# Altium PCB amplifier.PcbDoc
Units mm, origin at the board's own origin, x right, y up, seen from the top; angles counter-clockwise.
Board outline 98.04 x 69.72 mm, 2 copper layers (Top Layer, Bottom Layer); 32 components, 22 nets, 73 pads, 5 vias.
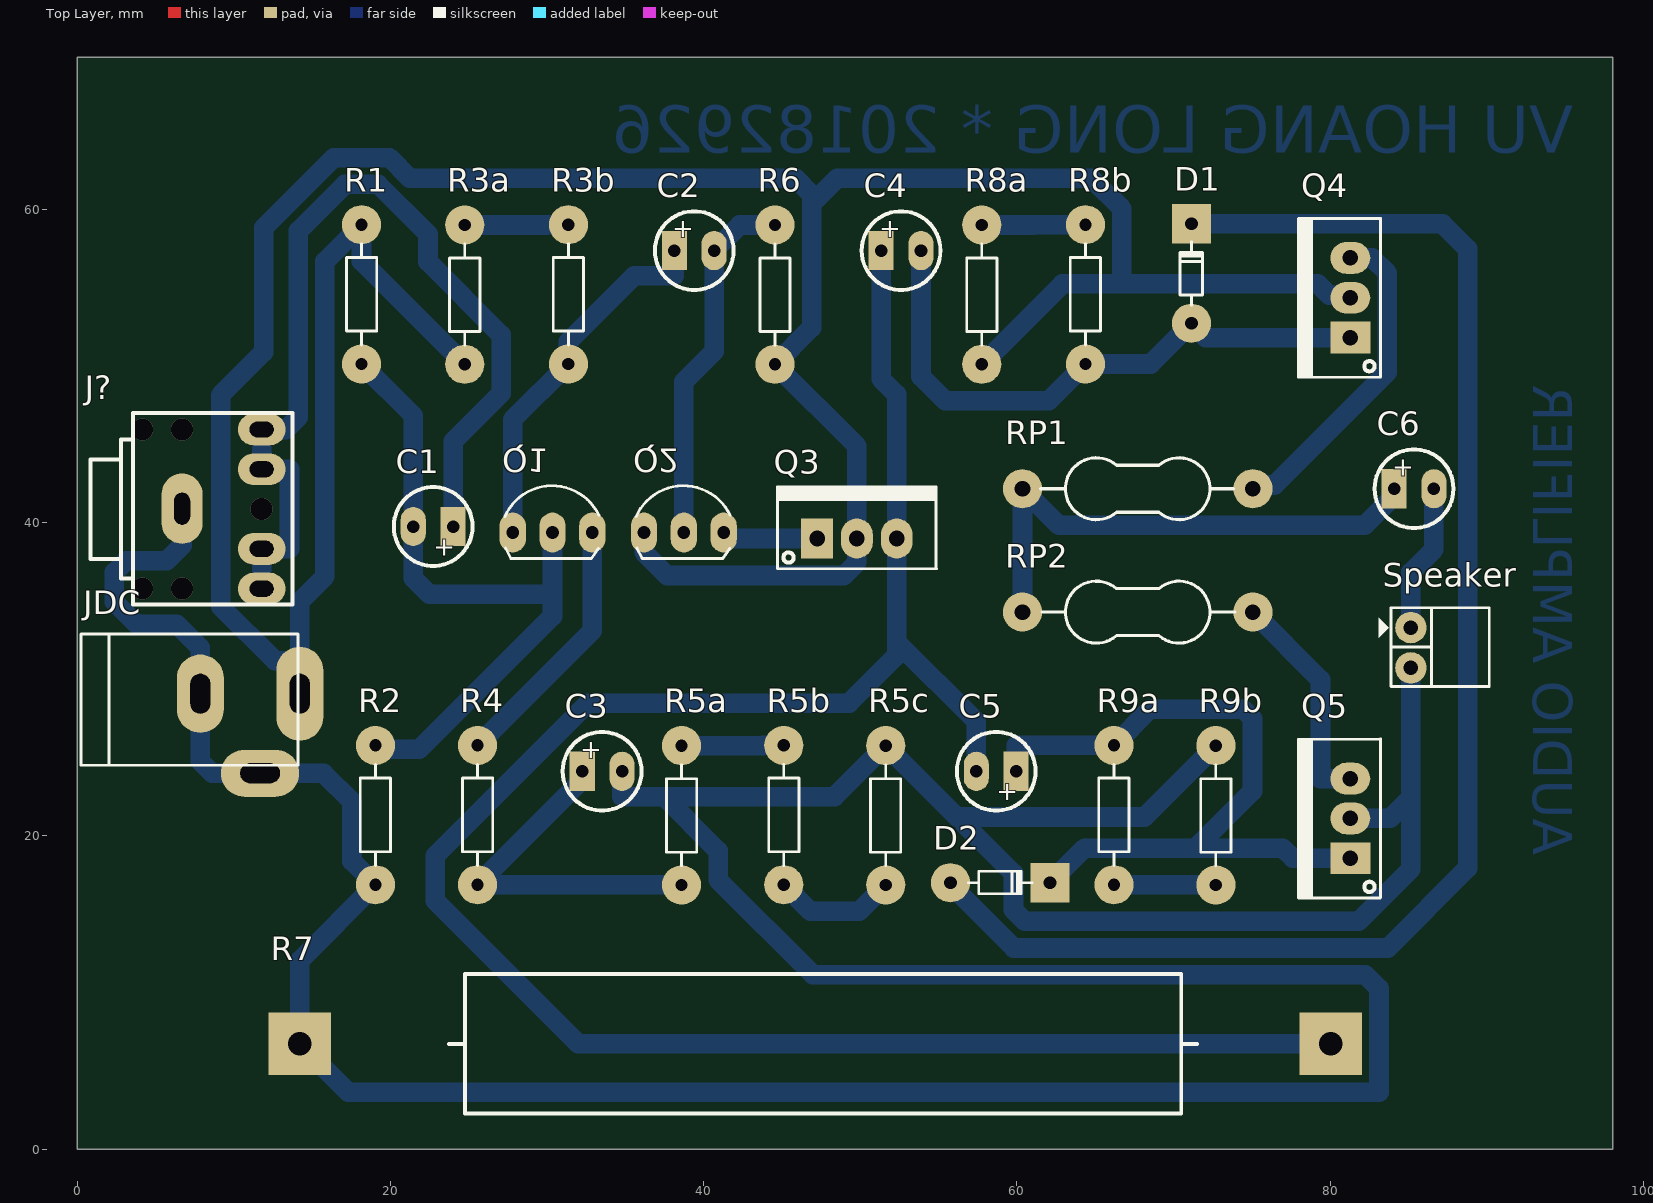
[diagram p0: Top Layer view]
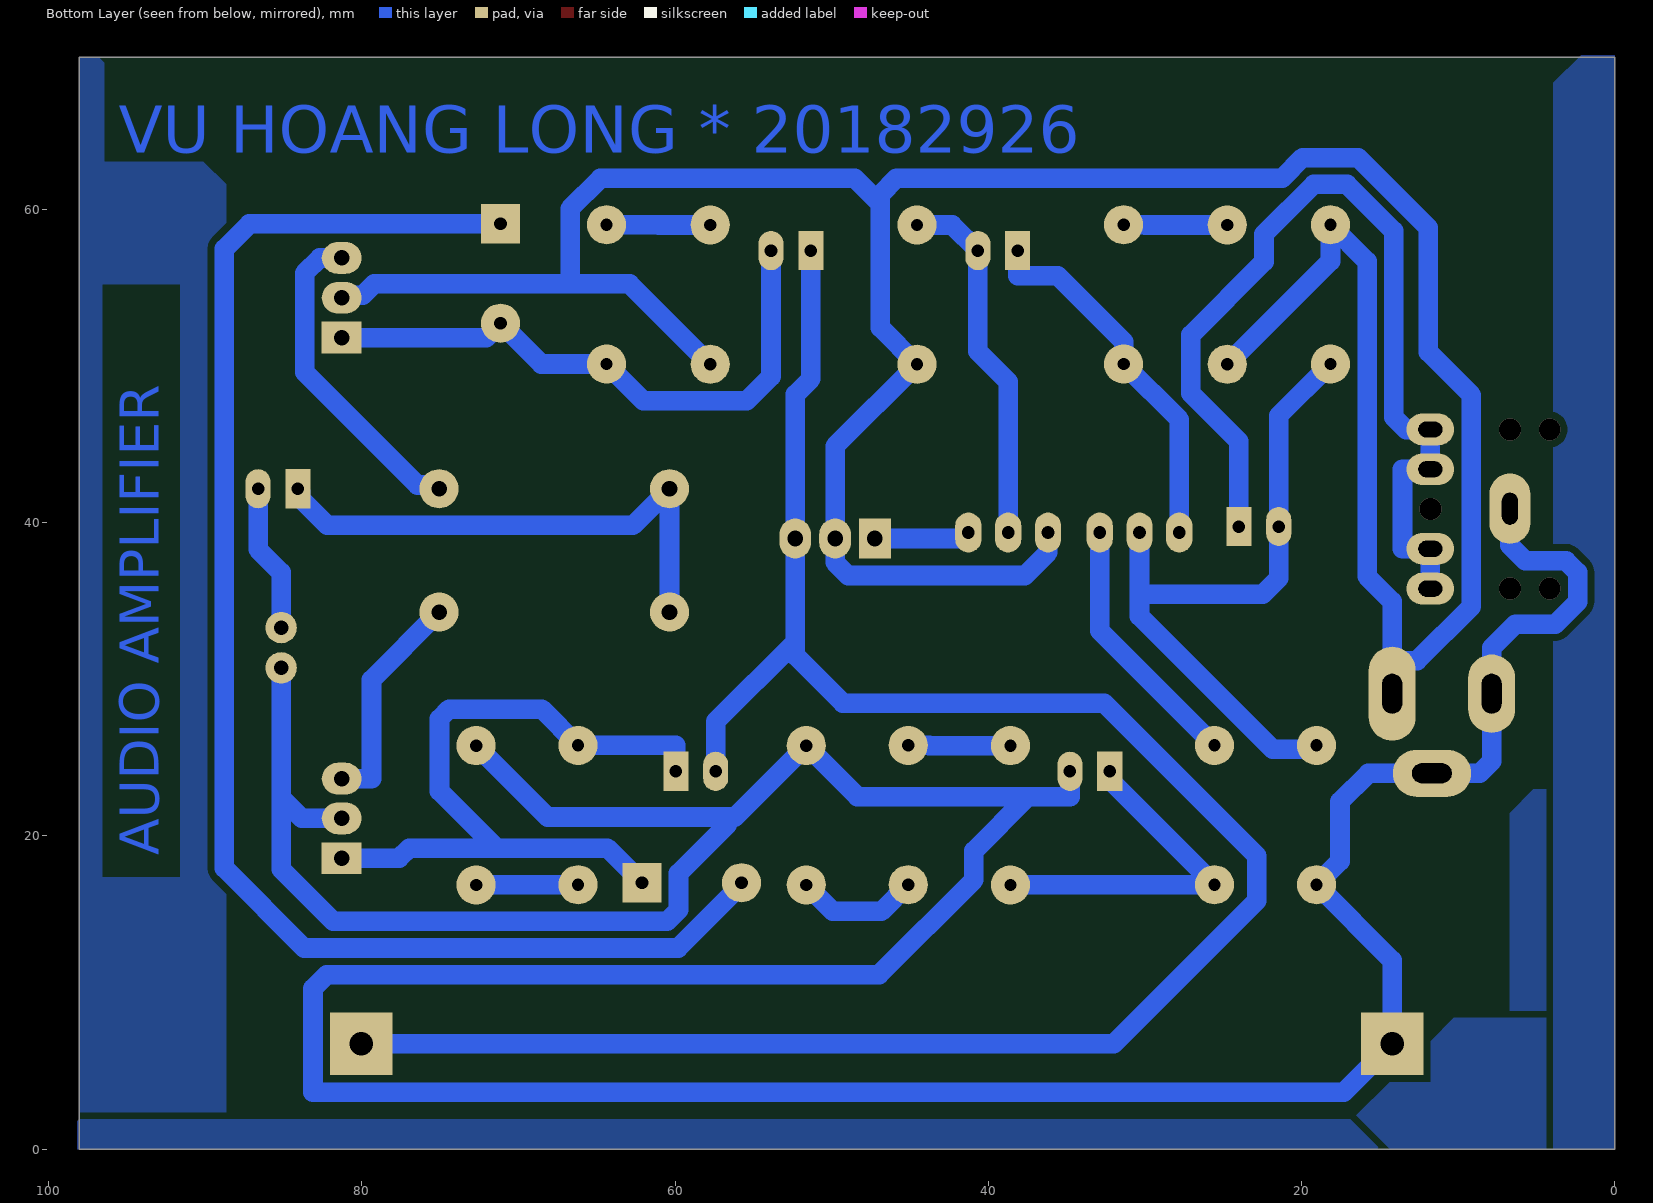
[diagram p1: Bottom Layer view, seen from below]
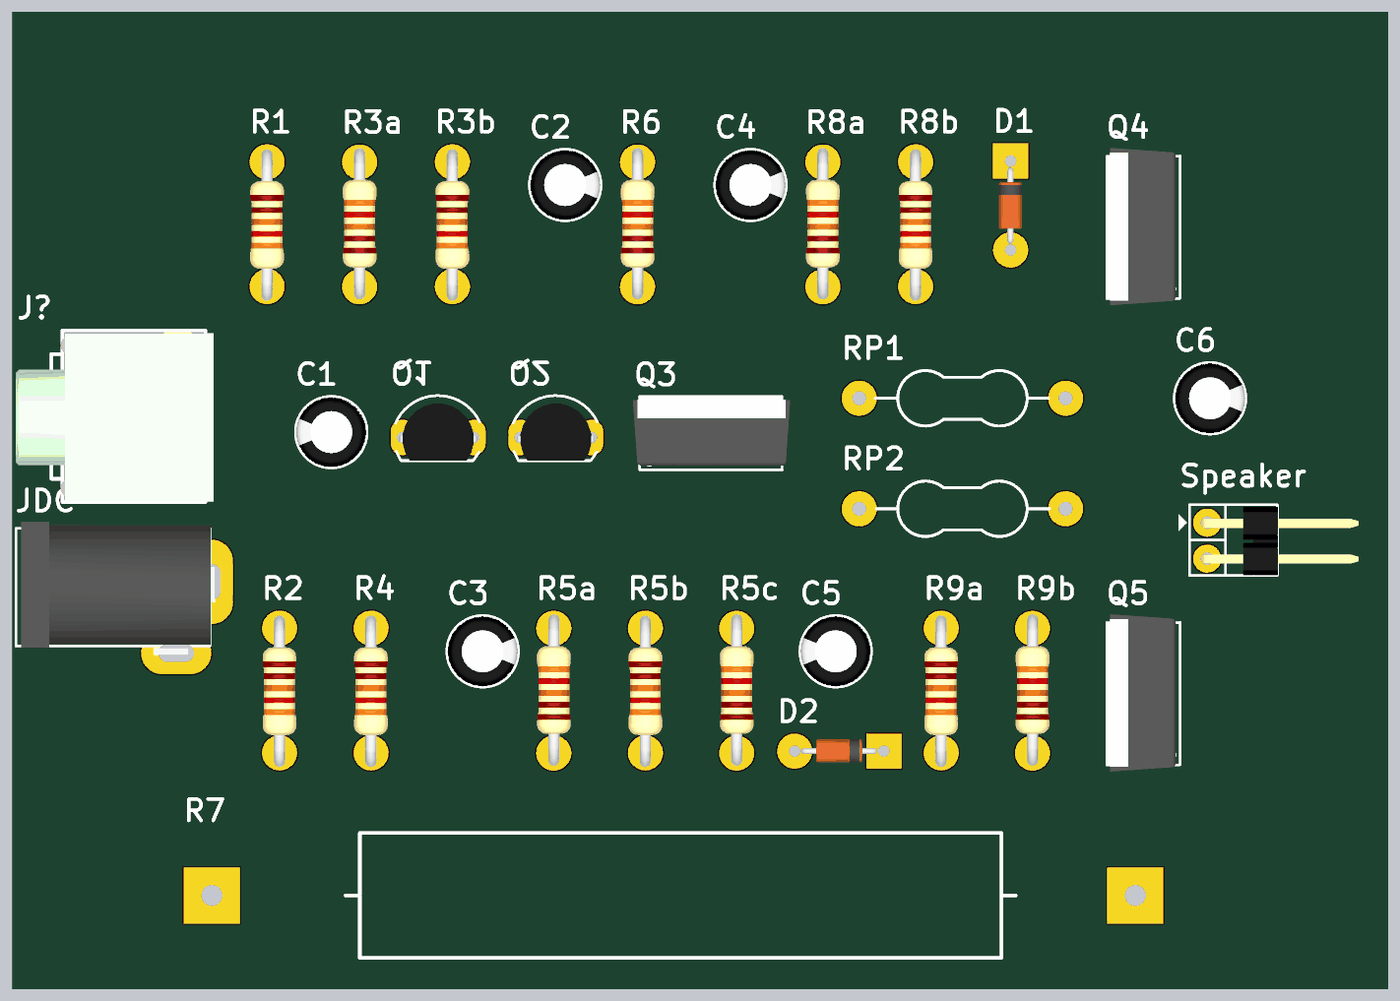
[diagram p2: 3D render of the assembled board from above, using the file's embedded part models]

## Layer stack, top to bottom
Top Solder: solder mask 0.0102, Solder Resist, Dk 3.5
Top Layer: signal copper 0.0356
Dielectric 1: dielectric 0.32, FR-4, Dk 4.8
Bottom Layer: signal copper 0.0356
Bottom Solder: solder mask 0.0102, Solder Resist, Dk 3.5

## Board outline
0,0 98.044,0 98.044,69.723 0,69.723

## Design rules (kind name [scope] priority, off if disabled: settings)
Clearance [All] p1: gap=0.45 ignorepadtopadclearanceinfootprint=FALSE
PolygonConnect [All] p1: connectstyle=Relief reliefconductorwidth=0.254 reliefentries=4 polygonreliefangle="90 Angle" airgapwidth=0.254
RoomDefinition amplifier [InComponentClass('amplifier')] p1: confinementstyle=ConfineIn formatcopy=TRUE lockcomponents=FALSE outline -2.565,-1.524 101.092,-1.524 101.092,71.755 -2.565,71.755
RoutingLayers [All] p1: top layer_v5=FALSE bottom layer_v5=TRUE
RoutingVias [All] p1: holewidth=0.711 width=1.5 viastyle="Through Hole" minholewidth=0.711 minwidth=1.5 maxholewidth=0.711 maxwidth=1.5
SolderMaskExpansion [All] p1: expansion=0.102 istentingtop=FALSE
Width [All] p1: maxlimit=1.25 minlimit=1.25 preferedwidth=1.25
29 further rules are at their usual default settings.

## Components (designator, comment, footprint, x,y, rotation, side; value= is the part's Value field where it differs from the comment)
C1 "220uF" C5mm 22.733,39.751 r180 top
C2 "220uF" C5mm 39.4,57.365 r0 top
C3 "220uF" C5mm 33.518,24.13 r0 top
C4 "220uF" C5mm 52.602,57.365 r0 top
C5 "220uF" C5mm 58.674,24.13 r180 top
C6 "2200uF" C5mm 85.344,42.164 r0 top
D1 "1N4148" D0.5A 71.136,55.904 r270 top
D2 "1N4148" D0.5A 58.928,17.018 r180 top
J? "Audio In" "CON Phone2" 9.246,40.869 r90 top
JDC "Jac DC" DC0 11.049,26.543 r0 top
Q1 "BC547B" QTO-92 30.353,39.37 r180 top value=C9014
Q2 "BC547B" QTO-92 38.735,39.37 r180 top value=C9014
Q3 "TIP41C" QTO-220 47.244,38.989 r0 top
Q4 "TIP41C" QTO-220 81.28,51.816 r90 top
Q5 "TIP42C" QTO-220 81.28,18.581 r90 top
R1 "13k" R1/4W 18.161,50.126 r90 top value="R1/4W - 1K"
R2 "2.7k" R1/4W 19.05,16.891 r90 top value="R1/4W - 1K"
R3a "200" R1/4W 24.75,59.001 r270 top value="R1/4W - 1K"
R3b "200" R1/4W 31.363,50.126 r90 top value="R1/4W - 1K"
R4 "6.2" R1/4W 25.566,16.891 r90 top value="R1/4W - 1K"
R5a "43" R1/4W 38.587,25.766 r270 top value="R1/4W - 1K"
R5b "43" R1/4W 45.116,16.891 r90 top value="R1/4W - 1K"
R5c "6.2" R1/4W 51.62,25.766 r270 top value="R1/4W - 1K"
R6 "120k" R1/4W 44.553,59.001 r270 top value="R1/4W - 1K"
R7 "10" "DIEN TRO 10W" 22.225,6.731 r0 top
R8a "200" R1/4W 57.755,59.001 r270 top value="R1/4W - 1K"
R8b "68" R1/4W 64.369,50.126 r90 top value="R1/4W - 1K"
R9a "68" R1/4W 66.189,16.891 r90 top value="R1/4W - 1K"
R9b "200" R1/4W 72.693,25.766 r270 top value="R1/4W - 1K"
RP1 "0.47" "DIEN TRO 1W (tube)" 60.35,42.164 r0 top
RP2 "0.47" "DIEN TRO 1W (tube)" 75.057,34.29 r180 top
Speaker "Jumper 2" jp2h 85.141,33.299 r270 top value="JP 2"

## Footprints (in the part's own frame and the unit in brackets; to place one, negate y for a bottom-side part, rotate by r counter-clockwise, add the part's x,y. Pads: shape width x height; smd on the part's side, far side on the other; paste and mask are expansions set on the pad)
C5mm [mm]
  rect 1.6x2.5 hole 0.8: 1(-1.27,0)
  oval 1.6x2.5 hole 0.8: 2(1.27,0)
  silkscreen extent -2.51,-2.51 2.51,2.51, body extent -2.5,-2.5 2.49,2.5, height 11.01
"CON Phone2" [mil]
  oval 80x120 hole 40 slot 60 at 90 deg: 1(-200,-100) 2(-100,-100) 3(100,-100) 4(200,-100)
  oval 177.17x102.36 hole 40 slot 80 at 0 deg: 5(1,100)
  silkscreen extent -240,-178 241,330, body extent -239,-202 233,354, height 394
D0.5A [mm] "Diode muoi, W 80mil, L 300mil"
  round 2.5 hole 0.813: 1(3.175,0)
  rect 2.5x2.5 hole 0.813: 2(-3.175,0)
  silkscreen extent -2.03,-0.76 2.03,0.71, body extent -2.76,-0.84 2.76,0.81, height 1.56
DC0 [mm] "Jac DC input"
  oval 3x6 hole 1.27 slot 2.54 at 90 deg: 1(3.175,2.54)
  oval 3x5 hole 1.27 slot 2.54 at 90 deg: 2(-3.175,2.54)
  oval 5x3 hole 1.27 slot 2.54 at 0 deg: 3(0.635,-2.54)
  silkscreen extent -10.79,-2.03 3.05,6.35, body extent -10.42,-2.67 3.4,6.84, height 11.02
"DIEN TRO 1W (tube)" [mm] "Dien tro 1W hinh ong"
  round 2.5 hole 1: 1(0,0) 2(14.707,0)
  silkscreen extent 1.14,-1.98 13.46,1.98
"DIEN TRO 10W" [mm]
  rect 4x4 hole 1.5: 1(-8,0) 2(57.8,0)
  silkscreen extent 1.52,-4.44 49.28,4.44, body extent 2.54,-4.44 48.26,4.44, height 7.62
jp2h [mm]
  round 2 hole 0.914: 1(0,0) 2(2.565,0)
  silkscreen extent -1.27,-2.06 3.76,5, body extent -1.12,-0.36 3.76,10.78, height 2.52
QTO-92 [mil] "TO-92"
  oval 66x100 hole 32: 1(-100,0) 2(0,0) 3(100,0)
  silkscreen extent -117,-118 120,65, body extent -109,-96 109,66, height 245
QTO-220 [mil] "TO-220 - 1-2-3"
  rect 80x100 hole 39: 1(0,0)
  oval 80x100 hole 39: 2(100,0) 3(200,0)
  silkscreen extent -100,-76 300,130, body extent -119,-64 322,121, height 755
R1/4W [mm] "R 1/4W, 2 Pin, 350mil"
  round 2.5 hole 0.787: 1(0,0) 2(8.89,0)
  silkscreen extent 1.22,-0.97 7.67,0.97, body extent -1.01,-1.19 9.79,1.21, height 2.83

## Part data
C1 C2 C3 C4 C5 C6: library part "Cap Pol 5mm", "Polarized Capacitor (Axial)", LatestRevisionDate=17-Jul-2002, LatestRevisionNote="Re-released for DXP Platform.", PackageReference=POLAR0.8, Published=8-Jun-2000, Publisher="Altium Limited"
D1 D2: library part D0.5A, "D0.5A"
J?: library part "CON Phone2", "Jac Phone Stereo", Creat by=VanDungEvn@Gmail.com
JDC: library part DCIN, "Jac DC input"
Q1 Q2: library part NPN_EBC, "P 600mW, EBC"
Q3 Q4: "NPN 2W, BCE"
Q5: "PNP 2W, BCE"
R1 R2 R3a R3b R4 R5a R5b R5c R6 R8a R8b R9a R9b: library part R1/4W, "Resistor 1/4W"
R7: library part "Res 10 W", "10W Res Power", Creator="Nguyen Ba Bien"
RP1 RP2: library part "Res 1W", "1W Res Power", Creator="Nguyen Ba Bien"
Speaker: library part "JP 2"

## Via types
v1: diameter 1.397, hole 1.397, Top Layer to Bottom Layer, 5 vias

## Nets (pads, with @x,y where several pads share a name; then routed paths per layer and width w, separated by ;. In a path a pad name is that pad's centre, name@x,y a point inside that pad or via, vN(x,y) a via of type N, cw(c..) or ccw(c..) an arc to the next point about the centre after c; other vN are vias at no path point)
+12: JDC.1 Q2.3 Q3.2 Q4.2 R1.2 R3a.2 R6.2 R8a.2 | length 207.9
  Bottom Layer w1.25: JDC.1 JDC.1@14.224,31.191 ; R3a.2 18.161,56.7 R1.2 15.824,56.679 15.824,36.576 14.224,34.976 JDC.1@14.224,31.191 ; Q2.3 36.195,38.1 37.668,36.627 48.946,36.627 49.784,37.465 Q3.2 49.784,44.88 R6.2 46.888,52.446 46.888,60.35 ; R8a.2 62.89,55.245 66.548,55.245 ; Q4.2@80.814,54.356 Q4.2 81.13,54.506 79.941,54.506 79.202,55.245 66.548,55.245 ; JDC.1@14.224,31.191 12.624,31.191 9.169,34.646 9.169,48.133 11.917,50.881 11.917,58.822 16.39,63.295 19.932,63.295 21.238,61.989 45.86,61.989 46.888,60.96 46.888,60.35 ; 46.888,60.35 48.514,61.976 64.77,61.976 66.7,60.046 66.7,55.397 66.548,55.245
GND: C3.2 J?.5 JDC.2 JDC.3 Q5.2 R2.1 R5c.1 R7.1 R9b.1 Speaker.2 | length 277
  Bottom Layer w1.25: J?.5 6.706,38.557 5.715,37.567 3.124,37.567 2.388,36.83 2.388,34.95 3.81,33.528 6.35,33.528 7.874,32.004 JDC.2 7.874,24.765 8.636,24.003 JDC.3 15.748,24.003 17.551,22.2 17.551,18.39 R2.1 14.225,12.066 R7.1 17.324,3.632 83.109,3.632 83.109,10.262 82.22,11.151 46.964,11.151 40.919,17.196 40.919,19.05 37.465,22.504 ; C3.2 34.788,22.504 37.465,22.504 ; R9b.1 68.137,21.209 57.15,21.209 ; Q5.2 83.82,21.121 85.141,22.442 ; Speaker.2 85.141,22.442 ; 37.465,22.504 48.359,22.504 R5c.1 56.177,21.209 57.15,21.209 ; 57.15,21.209 56.663,20.722 59.778,17.608 59.778,15.283 60.51,14.551 81.81,14.551 85.141,17.882 85.141,22.442
NetC1_1: C1.1 J?.1 J?.2 J?.3 J?.4 | length 61
  Bottom Layer w1.25: J?.1 J?.2 13.564,38.329 13.564,43.409 J?.3 J?.4 13.335,45.949 14.122,46.736 14.122,58.623 17.094,61.595 19.228,61.595 22.403,58.42 22.403,56.667 27.076,51.994 27.076,48.26 24.003,45.187 C1.1@24.003,39.738
NetC1_2: C1.2 Q1.2 R1.1 R2.2 | length 44.7
  Bottom Layer w1.25: R1.1 21.463,46.824 C1.2 21.463,36.449 22.479,35.433 30.226,35.433 30.353,35.56 ; R2.2 19.289,25.542 21.829,25.542 21.844,25.527 30.353,34.036 30.353,35.56 ; Q1.2 30.353,35.56
NetC2_1: C2.1 Q1.3 R3b.1 | length 23.8
  Bottom Layer w1.25: Q1.3 27.813,46.576 R3b.1 31.363,51.556 35.56,55.753 38.13,55.753 C2.1
NetC2_2: C2.2 Q2.2 R6.1 | length 23.4
  Bottom Layer w1.25: Q2.2 38.735,48.997 40.67,50.931 C2.2 42.306,59.001 R6.1
NetC3_1: C3.1 R4.1 R5a.2 | length 23
  Bottom Layer w1.25: C3.1 32.248,23.573 R4.1 32.055,16.891 32.07,16.876 R5a.2
NetC4_1: C4.1 C5.2 Q3.3 R7.2 | length 135.2
  Bottom Layer w1.25: C4.1 51.332,49.176 52.324,48.184 Q3.3 52.324,32.385 ; C5.2 57.404,27.305 52.324,32.385 ; R7.2 32.004,6.731 22.86,15.875 22.86,18.72 32.614,28.473 49.291,28.473 52.324,31.506 52.324,32.385
NetC4_2: C4.2 D1.1 Q4.1 R8b.1 | length 38.5
  Bottom Layer w1.25: C4.2 53.872,49.328 55.423,47.777 62.02,47.777 R8b.1 68.532,50.126 D1.1 72.049,51.816 Q4.1
NetC5_1: C5.1 D2.2 Q5.1 R9a.2 | length 48.1
  Bottom Layer w1.25: C5.1 59.944,25.781 R9a.2 68.501,28.092 74.422,28.092 75.032,27.483 75.032,22.86 71.399,19.228 ; D2.2 64.313,19.228 71.399,19.228 ; Q5.1 77.609,18.581 76.962,19.228 71.399,19.228
NetC6_1: C6.1 RP1.1 RP2.2 | length 33.8
  Bottom Layer w1.25: RP2.2 RP1.1 62.687,39.827 82.187,39.827 83.899,41.539 83.899,41.989 C6.1
NetC6_2: C6.2 Speaker.1 | length 9.5
  Bottom Layer w1.25: Speaker.1 85.141,36.824 86.614,38.297 C6.2
NetD1_2: D1.2 D2.1 | length 94.8
  Bottom Layer w1.25: D2.1 55.753,16.904 59.806,12.851 83.679,12.851 88.773,17.944 88.773,57.479 87.173,59.079 D1.2
NetQ1_1: Q1.1 R4.2 | length 16.6
  Bottom Layer w1.25: R4.2 32.893,33.108 Q1.1
NetQ2_1: Q2.1 Q3.1 | length 6.1
  Bottom Layer w1.25: Q2.1 41.656,38.989 Q3.1
NetQ4_3: Q4.3 RP1.2 | length 20.8
  Bottom Layer w1.25: RP1.2 75.296,42.403 76.439,42.403 83.642,49.606 83.642,55.931 82.677,56.896 Q4.3
NetQ5_3: Q5.3 RP2.1 | length 14.3
  Bottom Layer w1.25: RP2.1 79.375,29.972 79.375,23.661 Q5.3
NetR3a_1: R3a.1 R3b.2 | length 6.6
  Bottom Layer w1.25: R3a.1 29.992,59.001 30.008,59.016 R3b.2
NetR5a_1: R5a.1 R5b.2 | length 6.5
  Bottom Layer w1.25: R5a.1 43.759,25.766 43.774,25.781 R5b.2
NetR5b_1: R5b.1 R5c.2 | length 7.9
  Bottom Layer w1.25: R5b.1 46.823,15.183 49.928,15.183 R5c.2
NetR8a_1: R8a.1 R8b.2 | length 6.6
  Bottom Layer w1.25: R8a.1 61.036,59.001 61.051,59.016 R8b.2
NetR9a_1: R9a.1 R9b.2 | length 6.5
  Bottom Layer w1.25: R9a.1 72.678,16.891 R9b.2
copper on no net:
  other v1: 4.166,35.789 6.706,35.789 11.786,40.869 4.166,45.949 6.706,45.949

## Polygon pours and split planes (outlines as drawn)
no net on Bottom Layer "NONET_L02_P011" (solid, pour order 11): 3.937,22.987 5.207,22.987 6.731,21.463 6.731,8.255 4.064,8.255 3.937,8.382
no net on Bottom Layer "NONET_L02_P010" (solid, pour order 10): 14.351,0 16.51,2.159 10.287,8.382 3.937,8.382 3.937,0.381 3.556,0
no net on Bottom Layer "NONET_L02_P009" (solid, pour order 9): 3.937,68.072 2.159,69.85 0,69.85 0,0 3.937,0
no net on Bottom Layer "NONET_L02_P002" (solid, pour order 2): 98.044,1.905 98.044,69.723 96.774,69.723 88.646,61.595 88.646,1.905
no net on Bottom Layer "NONET_L02_P001" (solid, pour order 1): 16.129,1.905 98.044,1.905 98.171,1.778 98.171,0 14.351,0

## Other copper
Bottom Layer:
  text "VU HOANG LONG * 20182926" at 95.504,63.627 h3
  text "AUDIO AMPLIFIER" at 92.952,18.784 h2.5 r270

## Text inside footprints (layer, text, board x,y; h text height)
C1: Top Overlay "+" at 24.13,38.913 h1.2 r180
C2: Top Overlay "+" at 38.003,58.203 h1.2
C3: Top Overlay "+" at 32.121,24.968 h1.2
C4: Top Overlay "+" at 51.205,58.203 h1.2
C5: Top Overlay "+" at 60.071,23.292 h1.2 r180
C6: Top Overlay "+" at 83.947,43.002 h1.2